# Altium PCB cp2102_usbC.PcbDoc
Units mil, origin at the board's own origin, x right, y up, seen from the top; angles counter-clockwise.
Board outline 610 x 1080 mil, 2 copper layers (Top Layer, Bottom Layer); 19 components, 18 nets, 98 pads, 50 vias.
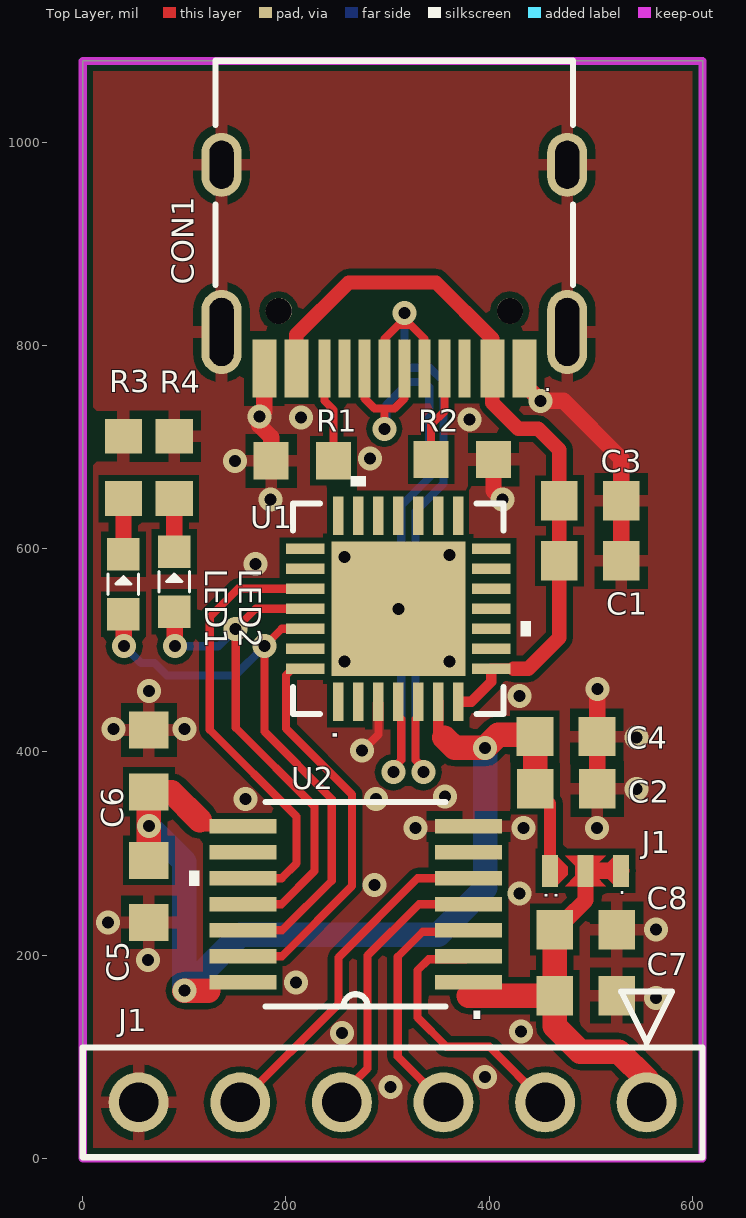
[diagram p0: Top Layer view]
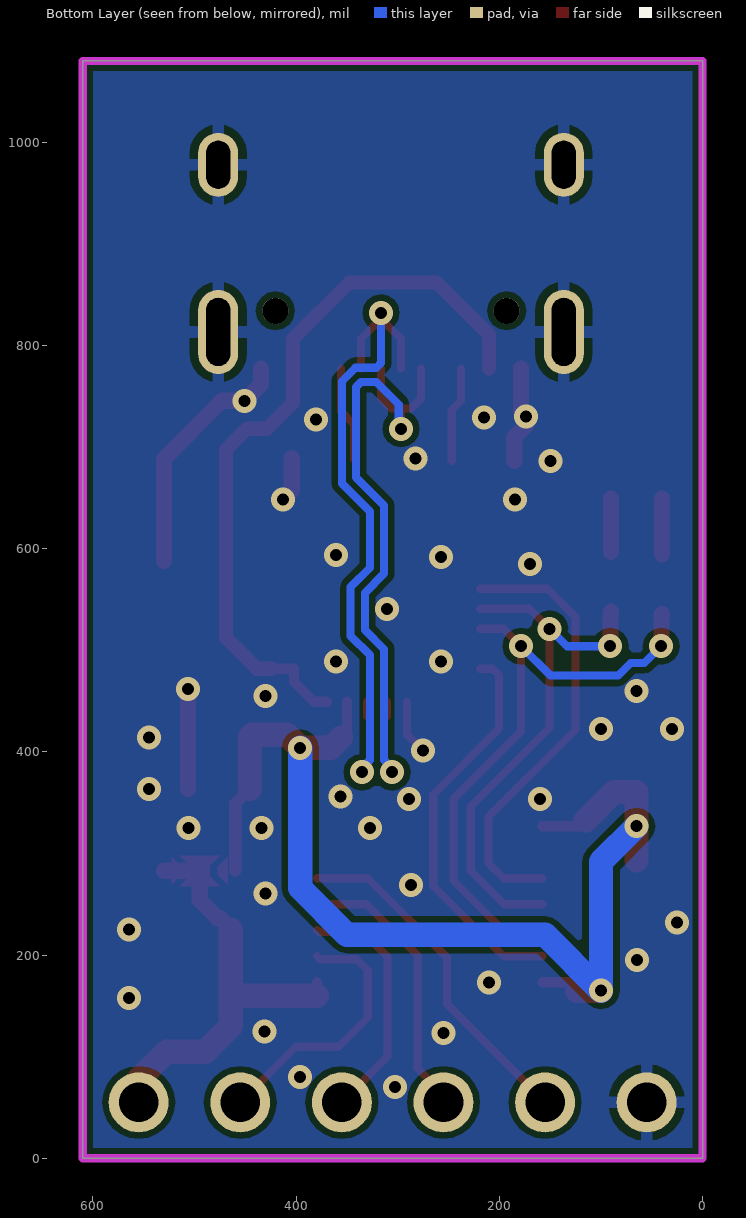
[diagram p1: Bottom Layer view, seen from below]
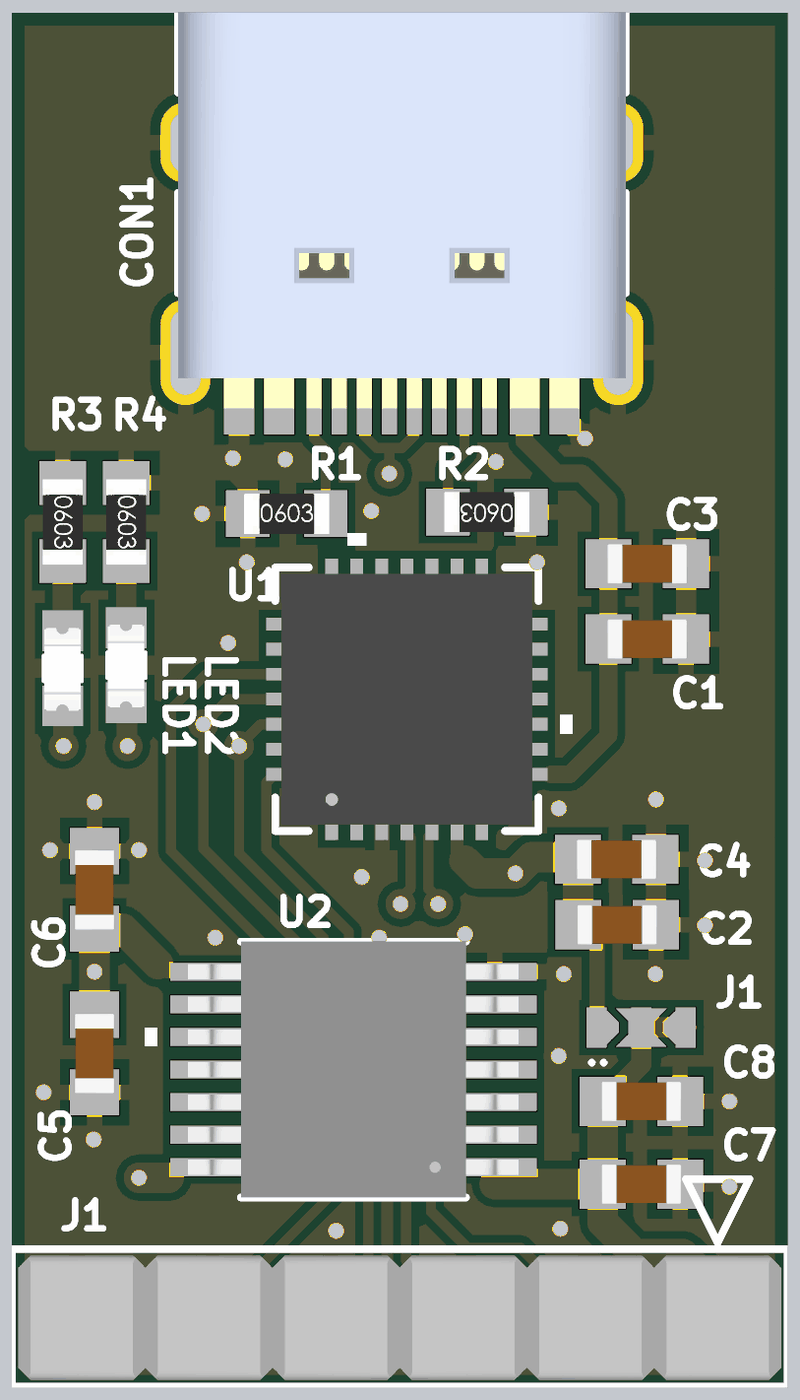
[diagram p2: 3D render of the assembled board from above, using the file's embedded part models]

## Layer stack, top to bottom
Top Solder: solder mask 0.4, Solder Resist, Dk 3.5
Top Layer: signal copper 1.4
Dielectric 1: dielectric 12.6, FR-4, Dk 4.8
Bottom Layer: signal copper 1.4
Bottom Solder: solder mask 0.4, Solder Resist, Dk 3.5

## Board outline
0,0 610,0 610,1080 0,1080

## Design rules (kind name [scope] priority, off if disabled: settings)
Clearance [All] p1: gap=6 ignorepadtopadclearanceinfootprint=FALSE except(0: Arc-Hole Track-Hole SMDPad-Hole THPad-Hole Via-Hole Fill-Hole Poly-Hole Region-Hole Text-Hole)
DiffPairsRouting [All] p1: maxlimit=10 minlimit=6 mostfreqgap=6 toplayer_minwidth=6 toplayer_maxwidth=15 toplayer_prefwidth=6 bottomlayer_minwidth=6 bottomlayer_maxwidth=15 bottomlayer_prefwidth=6 maxuncoupledlength=500
HoleSize [All] p1: absolutevalues=TRUE maxlimit=236.22 minlimit=1 maxpercent=80.000 minpercent=20.000
HoleToHoleClearance [All] p1: gap=3 allowstackedmicrovias=TRUE
MinimumSolderMaskSliver [All] p1: minsoldermaskwidth=1
PolygonConnect [All] p1: thpad.connectstyle=Relief thpad.reliefconductorwidth=12 thpad.reliefentries=4 thpad.polygonreliefangle="90 Angle" thpad.airgapwidth=8 smdpad.connectstyle=Relief smdpad.reliefconductorwidth=12 smdpad.reliefentries=4 smdpad.polygonreliefangle="90 Angle" smdpad.airgapwidth=8 via.connectstyle=Direct via.reliefconductorwidth=12 via.reliefentries=4 via.polygonreliefangle="45 Angle" via.airgapwidth=8
RoutingVias [All] p1: holewidth=15.75 width=23.62 viastyle="Through Hole" minholewidth=11.81 minwidth=19.68 maxholewidth=110.24 maxwidth=118.11
SilkToSilkClearance [All] p1: silktosilkclearance=3
SilkToSolderMaskClearance [IsPad] p1: minsilkscreentomaskgap=1 clearancetoexposedcopper=TRUE
SolderMaskExpansion [All] p1: expansion=1
Width [All] p1: maxlimit=40 minlimit=6 preferedwidth=10
24 further rules are at their usual default settings.

## Classes and differential pairs
differential pair class USB_D: D
component class cp2102_usbC: C1 C2 C3 C4 C5 C6 C7 C8 CON1 J1 LED1 LED2 R1 R2 R3 R4 U1 U2
differential pair D: +D_P -D_N

## Components (designator, comment, footprint, x,y, rotation, side; value= is the part's Value field where it differs from the comment)
C1 "1uF" *CAPC1608X90N 499.55,588.07 r0 top
C2 "1uF" *CAPC1608X90N 475.93,363.66 r0 top
C3 "1uF" *CAPC1608X90N 499.55,647.13 r0 top
C4 "1uF" *CAPC1608X90N 475.51,415 r0 top
C5 "1uF" *CAPC1608X90N 65,262.59 r270 top
C6 "1uF" *CAPC1608X90N 65,391.02 r90 top
C7 "1uF" *CAPC1608X90N 495,160 r0 top
C8 "1uF" *CAPC1608X90N 495,225 r0 top
CON1 "DX07S016JA1R1500" CONN12_016JA1R1500_JAE 306.63,977.84 r180 top
J1 "Component_1" jump_1t2p 494.87,282.96 r180 top
J1 "826648-6" CONN6_826648-6_TEC 555,55 r0 top
LED1 "SML-LX0603GW-TR" LED_SML-LX0603GW-TR_LUM 40,565 r270 top
LED2 "SML-LX0603GW-TR" LED_SML-LX0603GW-TR_LUM 90,567.5 r270 top
R1 "5k1" *RESC1608X55N 216.08,686.5 r0 top
R2 "5k1" *RESC1608X55N 373.56,687.7 r180 top
R3 "5k1" *RESC1608X55N 40,680 r270 top
R4 "5k1" *RESC1608X55N 90,680 r270 top
U1 "CP2102-GMR" QFN28_5X5_SIL 310.57,540.83 r90 top
U2 "TXS0104EPWR" PW14 268.57,250 r180 top

## Footprints (in the part's own frame and the unit in brackets; to place one, negate y for a bottom-side part, rotate by r counter-clockwise, add the part's x,y. Pads: shape width x height; smd on the part's side, far side on the other; paste and mask are expansions set on the pad)
*CAPC1608X90N [mm]
  rect 0.92x0.98 smd: 1(-0.775,0) 2(0.775,0)
  body extent -0.8,-0.4 0.8,0.4, height 0.6
*RESC1608X55N [mm]
  rect 0.87x0.93 smd: 1(-0.78,0) 2(0.78,0)
  body extent -0.85,-0.4 0.85,0.4, height 0.56
CONN6_826648-6_TEC [mil]
  round 59 hole 39 mask+0: 1(0,0) 2(-100,0) 3(-200,0) 4(-300,0) 5(-400,0) 6(-500,0)
  silkscreen extent -555,-54 55,109, body extent -550,-49 50,49, height 433
CONN12_016JA1R1500_JAE [mm]
  rect 0.3x1.45 smd: CC1(-1.25,5.095) CC2(1.75,5.095) D+(-0.25,5.095) D+(0.75,5.095) D-(-0.75,5.095) D-(0.25,5.095) SBUS1(1.25,5.095) SBUS2(-1.75,5.095)
  rect 0.6x1.45 smd: GND(-3.25,5.095) GND(3.25,5.095) VBUS(-2.45,5.095) VBUS(2.45,5.095)
  round 0.65 hole 0.65 unplated: M1(2.89,3.65) M2(-2.89,3.65)
  oval 1x2.1 hole 0.6 slot 1.7 at 90 deg mask+0: S(-4.32,4.18) S(4.32,4.18)
  oval 1x1.6 hole 0.6 slot 1.2 at 90 deg mask+0: S(-4.32,0) S(4.32,0)
  silkscreen extent -4.47,-2.6 4.47,3, body extent -4.47,-2.6 4.47,5.3, height 3.2
jump_1t2p [mm]
  rect 0.4x0.8 smd paste+0: C(0,0)
  rect 0.4x0.8 smd: S1(-0.889,0) S2(0.889,0)
  Top Layer region: -0.7,-0.353 -0.7,0.353 -0.45,0.103 -0.45,-0.103
  Top Layer region: 0,-0.381 -0.508,-0.381 -0.254,-0.127 -0.254,0.127 -0.508,0.381 0,0.381
  Top Layer region: 0,0.381 0.508,0.381 0.254,0.127 0.254,-0.127 0.508,-0.381 0,-0.381
  Top Layer region: 0.7,0.353 0.7,-0.353 0.45,-0.103 0.45,0.103
LED_SML-LX0603GW-TR_LUM [mil]
  rect 32x32 smd paste+0 mask+0: 1(-29.5,0) 2(29.5,0)
  silkscreen extent -10,-15 10,15, body extent -32,-14 33,14, height 27
PW14 [mil]
  rect 66x14 smd: 1(-111,76.77) 2(-111,51.18) 3(-111,25.59) 4(-111,0) 5(-111,-25.59) 6(-111,-51.18) 7(-111,-76.77) 8(111,-76.77) 9(111,-51.18) 10(111,-25.59) 11(111,0) 12(111,25.59) 13(111,51.18) 14(111,76.77)
  silkscreen extent -89,-101 164,101, body extent -130,-101 130,101, height 47
QFN28_5X5_SIL [mil]
  rect 38x10 smd paste+0 mask+0: 1(-91.5,59.06) 2(-91.5,39.37) 3(-91.5,19.68) 4(-91.5,0) 5(-91.5,-19.69) 6(-91.5,-39.37) 7(-91.5,-59.06) 15(91.5,-59.06) 16(91.5,-39.37) 17(91.5,-19.69) 18(91.5,0) 19(91.5,19.68) 20(91.5,39.37) 21(91.5,59.06)
  rect 10x38 smd paste+0 mask+0: 8(-59.06,-91.5) 9(-39.37,-91.5) 10(-19.69,-91.5) 11(0,-91.5) 12(19.68,-91.5) 13(39.37,-91.5) 14(59.06,-91.5) 22(59.06,91.5) 23(39.37,91.5) 24(19.68,91.5) 25(0,91.5) 26(-19.69,91.5) 27(-39.37,91.5) 28(-59.06,91.5)
  rect 132x132 smd paste-65.5 mask+0: 29(0,0)
  silkscreen extent -104,-130 130,104, body extent -98,-98 99,99, height 37

## Part data
C1 C2 C3 C4 C5 C6 C7 C8: library part 06033C103KAT2A, "0603 10 nF 25 V 10% Tolerance X7R Surface Mount Multilayer Ceramic Capacitor", Package="1608 AVX", Availability=Unavailable, MF=AVX, MP=06033C103KAT2A, Price=None, SnapEDA_Link=https://www.snapeda.com/parts/06033C103KAT2A/AVX%20/%20Kyocera/view-part/?ref=snap
CON1 LED1 LED2 U1: "No Description Available", Copyright="Copyright (C) 2018 Accelerated Designs. All rights reserved", RefDes=RefDes, Type=DEV
  CON1: Built_By=EMA_Matt, Datasheet=https://www.digikey.com/product-detail/en/DX07S016JA1R1500/670-DX07S016JA1R1500CT-ND/11586676?utm_campaign=buynow&WT.z_cid=ref_octopart_dkc_buynow&utm_medium=aggregator&curr=usd&site=us&utm_source=octopart, Manufacturer_Part_Number=DX07S016JA1R1500, SourceLibrary=JAE_Electronics_2020-03-30, Vendor="JAE Electronics"
  LED1 LED2: Built_By=EMA_Cory, Datasheet=https://www.lumex.com/spec/SML-LX0603GW-TR.pdf, Manufacturer_Part_Number=SML-LX0603GW-TR, SourceLibrary=Lumex_2020-09-08, Vendor=Lumex
  U1: Built_By=EMA_UL_Team, Manufacturer_Part_Number=CP2102-GMR, SourceLibrary=Silicon_Labs_2018-12-15, Vendor="Silicon Labs"
J1: "6P AMPMODU II STIFT LEI", Built_By=EMA_Justin, Copyright="Copyright (C) 2016 Accelerated Designs. All rights reserved", Datasheet=https://www.te.com/commerce/DocumentDelivery/DDEController?Action=showdoc&DocId=Customer+Drawing%7F826629%7FAC%7Fpdf%7FEnglish%7FENG_CD_826629_AC.pdf%7F826648-6, Manufacturer_Part_Number=826648-6, PITCH(MM)=2.54, POSITIONS=6, PRODUCT=Connector, RefDes=RefDes, ROWS/CONFIG=1, SourceLibrary=TE_Connectivity_250_Part_Delivery_4_2018-09-04, TE_Part_Number=826648-6, Type=DEV, Vendor="TE Connectivity"
R1 R2 R3 R4: library part CR0603-FX-4701ELF, "Res Thick Film 0603 4.7K Ohm 1% 1/10W 100ppm/C Molded SMD SMD Paper Tape on Plastic Reel", Package="1608 Rohm Semiconductor", Availability=Unavailable, MF=Bourns, MP=CR0603-FX-4701ELF, Price=None, SnapEDA_Link=https://www.snapeda.com/parts/CR0603-FX-4701ELF/Bourns/view-part/?ref=snap
U2: "No Description Available", Mfr_Name="Texas Instruments", Copyright="Copyright (C) 2021 Ultra Librarian. All rights reserved.", Manufacturer_Part_Number=TXS0104EPWR, RefDes=RefDes, Type=DEV

## Via types
v1: diameter 23.62, hole 11.81, Top Layer to Bottom Layer, tented both sides, 50 vias

## Nets (pads, with @x,y where several pads share a name; then routed paths per layer and width w, separated by ;. In a path a pad name is that pad's centre, name@x,y a point inside that pad or via, vN(x,y) a via of type N, cw(c..) or ccw(c..) an arc to the next point about the centre after c; other vN are vias at no path point)
+3V3: C2.1 C4.1 C5.1 C6.1 J1.S2 U1.6 U2.8 U2.14 | length 1162.3
  Top Layer w10: 115,332.77 121,326.77 U2.8 ; 123.34,165 131.57,173.23 U2.14 ; U1.6 349.94,420.08 355.85,414.17 ; C4.1@443.44,416.81 C4.1@445.41,414.84
  Top Layer w12: C2.1 460,349.08 J1.S2@460,283.09
  Top Layer w24: C5.1 v1(65,326.8) C6.1 87.27,360.5 115,332.77 ; v1(100,165) 123.34,165 ; 355.85,414.17 366.03,403.99 v1(395.96,403.99) 408.78,416.81 C4.1@443.44,416.81 ; C2.1 C4.1@445.41,414.84
  Bottom Layer w24: v1(65,326.8) 100,291.8 v1(100,165) 155,220 350,220 395.96,265.96 v1(395.96,403.99)
+5: C1.1 C3.1 CON1.VBUS U1.7 U1.8 | length 736.7
  Top Layer w10: U1.7 382.49,449.33 402.07,468.91 U1.8 423.98,481.77
  Top Layer w14: CON1.VBUS@210.18,777.24 210.18,810.51 261.72,862.06 347.61,862.06 403.09,806.58 403.09,777.24 403.09,743.58 428.68,717.99 448.37,717.99 469.04,697.32 C1.1 469.04,512.31 438.5,481.77 423.98,481.77
D_N: CON1.D- U1.5 | length 705.6
  Top Layer w8: CON1.D-@296.8,777.24 296.8,806.58 310.57,820.35 v1@316.48,820.35 ; v1(316.47,832.16) v1@316.48,820.35 ; U1.5 330.26,435.33 327.41,432.48 327.41,392.04 335.22,384.23 v1(335.22,380) ; CON1.D-@336.17,777.24 336.17,806.57 322.38,820.35 v1@316.48,820.35
  Bottom Layer w8: v1(316.47,832.16) 316.47,782.69 321.16,778 341.8,778 355,764.8 355,664.27 327.41,636.68 327.41,581.23 346.38,562.26 346.38,514.17 327.41,495.2 327.41,392.04 335.22,384.23 v1(335.22,380)
D_P: CON1.D+ U1.4 | length 687.4
  Top Layer w8: CON1.D+@277.11,777.24 277.11,747.92 286.96,738.07 296.8,738.07 ; v1(296.8,717.99) 296.8,738.07 ; v1(305.6,380) 305.6,384.23 313.41,392.04 313.41,432.48 310.57,435.33 U1.4 ; CON1.D+@316.48,777.24 316.48,747.91 306.64,738.07 296.8,738.07
  Bottom Layer w8: v1(296.8,717.99) 298.96,720.16 298.96,741.8 321.16,764 336,764 341,759 341,670.07 313.41,642.48 313.41,575.43 332.38,556.47 332.38,519.97 313.41,501 313.41,392.04 305.6,384.23 v1(305.6,380)
DTR: U1.28 U2.13 | length 391.9
  Top Layer w8: U2.13 195.91,198.82 265,267.9 265,358.05 200.19,422.86 200.19,475.37 206.59,481.77 U1.28
GND: C1.2 C2.2 C3.2 C4.2 C5.2 C6.2 C7.2 C8.2 CON1.GND CON1.S J1.6 R1.1 R2.1 R3.1 R4.1 U1.3 U1.29 U2.7 | length 536.8
  Top Layer w8: v1(275,401.2) 290.89,417.08 U1.3
  Top Layer w16: CON1.GND@178.68,777.24 178.68,734.99 v1(173.69,730) 173.69,721.46 185.37,709.78 R1.1 ; R2.1@404.27,688.91 404.27,657 v1(412.93,648.34) ; CON1.GND@434.59,777.24 434.59,761.68 v1(450.71,745.55) 473.17,745.55 530.06,688.66 C1.2 ; C2.2 v1(506.44,462.09)
  other v1: 302.75,70 395.96,80 255,123.35 431.28,125 564.27,157.98 210,173.23 64.34,195 564.27,225 25,232.08 430,260.69 286.96,268.99 327.41,325 433.96,325 506.02,325 160,353.57 288.82,353.57 356.34,356.28 545,363.22 545,414.17 30,422.33 100,422.33 430,455 65,460 257.43,488.86 360.98,488.86 310.57,540.83 170,585 257.43,592.01 360.98,594 184.68,648.34 149.58,686.5 282.67,688.66 380.63,727.36 215,729.14
L_DTR: J1.2 U2.2 | length 262.3
  Top Layer w8: U2.2 376.57,195.82 340.34,195.82 329.52,185 329.52,138.54 358.26,109.8 400.2,109.8 J1.2
L_RTS: J1.5 U2.5 | length 342.9
  Top Layer w8: J1.5 155,55.51 251.52,152.02 251.52,197.59 329.52,275.59 U2.5
L_RXD: J1.4 U2.4 | length 275.1
  Top Layer w8: J1.4 255,63.05 280.32,88.37 280.32,199.43 330.89,250 U2.4
L_TXD: J1.3 U2.3 | length 242.4
  Top Layer w8: J1.3 309.96,100.04 309.96,198.31 334.57,222.93 378.09,222.93 U2.3
NetCON1_CC1: CON1.CC1 R2.2 | length 94.9
  Top Layer w8: R2.2 342.85,721.93 355.85,734.93 CON1.CC1
NetCON1_CC2: CON1.CC2 R1.2 | length 94.5
  Top Layer w8: CON1.CC2 237.74,745.55 246.79,736.5 R1.2
NetLED1_1: LED1.1 R3.2 | length 54.8
  Top Layer w16: LED1.1 R3.2
NetLED2_1: LED2.1 R4.2 | length 52.3
  Top Layer w16: LED2.1 R4.2
RTS: U1.24 U2.10 | length 442.5
  Top Layer w8: U2.10 195.78,275.59 210.5,290.31 210.5,336.27 125,421.77 125,532.9 152.61,560.51 U1.24
RXD: LED2.2 U1.25 U2.11 | length 532.4
  Top Layer w8: U2.11 195.41,250 228.11,282.7 228.11,346.14 150.54,423.71 v1(150.54,521.14) 170.22,540.83 U1.25
  Top Layer w16: LED2.2 90.5,537.5 90.5,504.5 v1(91,504)
  Bottom Layer w8: v1(91,504) 133.39,504 v1(150.54,521.14)
TXD: LED1.2 U1.26 U2.12 | length 607.2
  Top Layer w8: U2.12 196.22,224.41 245,273.19 245,353.57 178.68,419.89 v1(178.68,504) 195.82,521.14 U1.26
  Top Layer w16: LED1.2 40.33,535.17 40.33,504.33 v1(40.66,504)
  Bottom Layer w8: v1(40.66,504) 57.33,487.33 70.65,487.33 82.98,475 149.68,475 v1(178.68,504)
VDUT: C7.1 C8.1 J1.1 J1.C J1.S1 U2.1 | length 435
  Top Layer w10: U2.1 379.57,160.06 379.63,160
  Top Layer w16: C8.1 464.49,226.18 474.6,236.29 477.07,236.29 494.87,254.09 J1.C 495,283.09 J1.S1@530,283.09
  Top Layer w24: 379.63,160 C7.1 ; C8.1 C7.1 ; J1.1 555,77.59 527.59,105 489.6,105 464.49,130.11 C7.1
pads on no net: CON1.M1 CON1.M2 CON1.SBUS1 CON1.SBUS2 U1.1 U1.2 U1.9 U1.10 U1.11 U1.12 U1.13 U1.14 U1.15 U1.16 U1.17 U1.18 U1.19 U1.20 U1.21 U1.22 U1.23 U1.27 U2.6 U2.9

## Polygon pours and split planes (outlines as drawn)
GND on Bottom Layer "GND_L02_P002" (solid, remove dead copper, pour order 2): 0,1080 0,0 610,0 610,1080
GND on Top Layer "GND_L01_P000" (solid, remove dead copper, pour order 0): 0,1080 0,0 610,0 610,1080

## Keep-outs
Keep-Out Layer:
  the board outline again, w8

## Text inside footprints (layer, text, board x,y; h text height)
J1: Top Overlay ":" at 454.87,262.96 h18 r270